# Altium PCB Hall_Sensor.PcbDoc
Units mil, origin at the board's own origin, x right, y up, seen from the top; angles counter-clockwise.
Board outline 6000 x 4000 mil, 2 copper layers (Top Layer, Bottom Layer); 4 components, 3 nets, 12 pads, 0 vias.
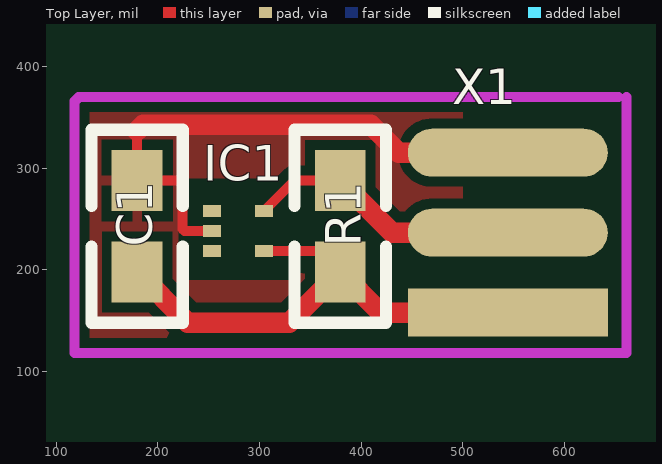
[diagram p0: Top Layer view]
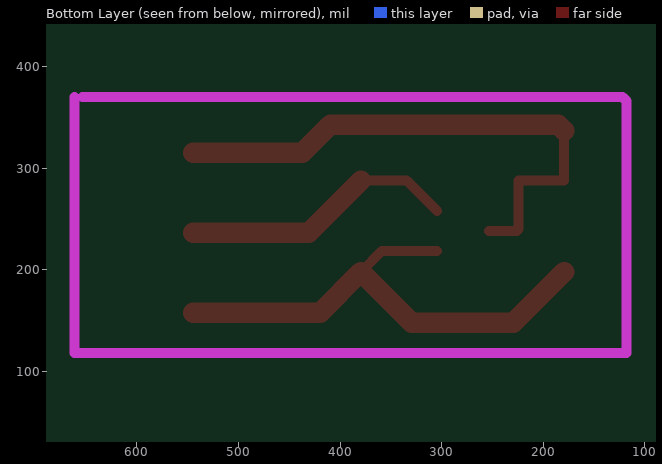
[diagram p1: Bottom Layer view, seen from below]

## Layer stack, top to bottom
Top Solder: solder mask 0.4, Solder Resist, Dk 3.5
Top Layer: signal copper 1.4
Dielectric 1: dielectric 12.6, FR-4, Dk 4.8
Bottom Layer: signal copper 1.4
Bottom Solder: solder mask 0.4, Solder Resist, Dk 3.5

## Board outline
-3850.39,-1437.01 2149.61,-1437.01 2149.61,2562.99 -3850.39,2562.99

## Design rules (kind name [scope] priority, off if disabled: settings)
Clearance "AH180N Clearance" [InComponent('IC1')] p1: gap=5 // Special Clearance tight
Clearance [All] p2: gap=10
PlaneConnect [All] p1: planeconnectstyle=Relief reliefexpansion=20 reliefentries=4 reliefconductorwidth=10 reliefairgap=15
PolygonConnect [All] p1: connectstyle=Relief reliefconductorwidth=10 reliefentries=4 polygonreliefangle="90 Angle" airgapwidth=10
RoutingVias [All] p1: holewidth=28 width=50 viastyle="Through Hole" minholewidth=28 minwidth=50 maxholewidth=28 maxwidth=50
SolderMaskExpansion [All] p1: expansion=4
UnpouredPolygon [All] p1: allowunpoured=FALSE
Width [All] p1: maxlimit=40 minlimit=10 preferedwidth=20
28 further rules are at their usual default settings.

## Components (designator, comment, footprint, x,y, rotation, side; value= is the part's Value field where it differs from the comment)
C1 "47nF" 0805 179.61,287.99 r270 top
IC1 "AH180N  Hall Sens" "AH180N SOT553" 304.61,257.99 r270 top
R1 "47k" 0805 379.61,287.99 r270 top
X1 "Header 3" "Edge Connector 3 Pin" 544.61,157.99 r90 top

## Footprints (in the part's own frame and the unit in brackets; to place one, negate y for a bottom-side part, rotate by r counter-clockwise, add the part's x,y. Pads: shape width x height; smd on the part's side, far side on the other; paste and mask are expansions set on the pad)
0805 [mil]
  rect 60x50 smd: 1(0,0) 2(90,0)
  silkscreen extent -50,-45 140,45
"AH180N SOT553" [mm] "AH180N SOT553"
  rect 0.3x0.45 smd: 1(0,-1.3) 2(0.5,-1.3) 3(1,-1.3) 4(1,0) 5(0,0)
"Edge Connector 3 Pin" [mm]
  rect 1.2x5 smd: 1(0,0)
  oval 1.2x5 smd: 2(2,0) 3(4,0)

## Part data
C1: library part C?, "Normaler Kondensator"
IC1: library part AH180N, "Hall Sensor AH180N"
R1: library part R?, "Normaler Widerstand"
X1: "Header, 3-Pin"

## Nets (pads, with @x,y where several pads share a name; then routed paths per layer and width w, separated by ;. In a path a pad name is that pad's centre, name@x,y a point inside that pad or via, vN(x,y) a via of type N, cw(c..) or ccw(c..) an arc to the next point about the centre after c; other vN are vias at no path point)
NetC1_1: C1.1 IC1.2 X1.3 | length 554.7
  Top Layer w10: 176.52,334 179.61,337.09 C1.1 224.41,287.99 224.41,240.16 226.26,238.31 IC1.2
  Top Layer w20: 179.61,337.09 185.51,342.99 409.61,342.99 437.13,315.47 X1.3
NetC1_2: C1.2 IC1.4 R1.2 X1.1 | length 506.5
  Top Layer w10: IC1.4 358.98,218.62 R1.2
  Top Layer w20: C1.2 229.61,147.99 329.61,147.99 R1.2 419.61,157.99 X1.1
NetIC1_5: IC1.5 R1.1 X1.2 | length 273.7
  Top Layer w10: IC1.5 334.61,287.99 R1.1
  Top Layer w20: R1.1 430.87,236.73 X1.2
pads on no net: IC1.1 IC1.3

## Polygon pours and split planes (outlines as drawn)
NetC1_1 on Top Layer "GND_Polygon" (solid, pour order 22): 120,370 500,370 500,118.11 120,118.11 118.11,120 118.11,366.14 120.08,368.11

## Keep-outs
Keep-Out Layer:
  lines w10: 653.54,370.08 122.05,370.08 118.11,366.14 118.11,118.11 661.42,118.11 661.42,370.08
Drill Drawing:
  lines w10: 653.54,370.08 661.42,370.08

## Silkscreen, mask and mechanical layers (free items; w line width, h text height)
Mechanical 1:
  lines w10: 0,0 779.53,0 779.53,118.11 779.53,476.38 661.42,476.38 0,476.38 0,0